# EAGLE board Comms_Main (EAGLE 7.7.0), part 1 of 2
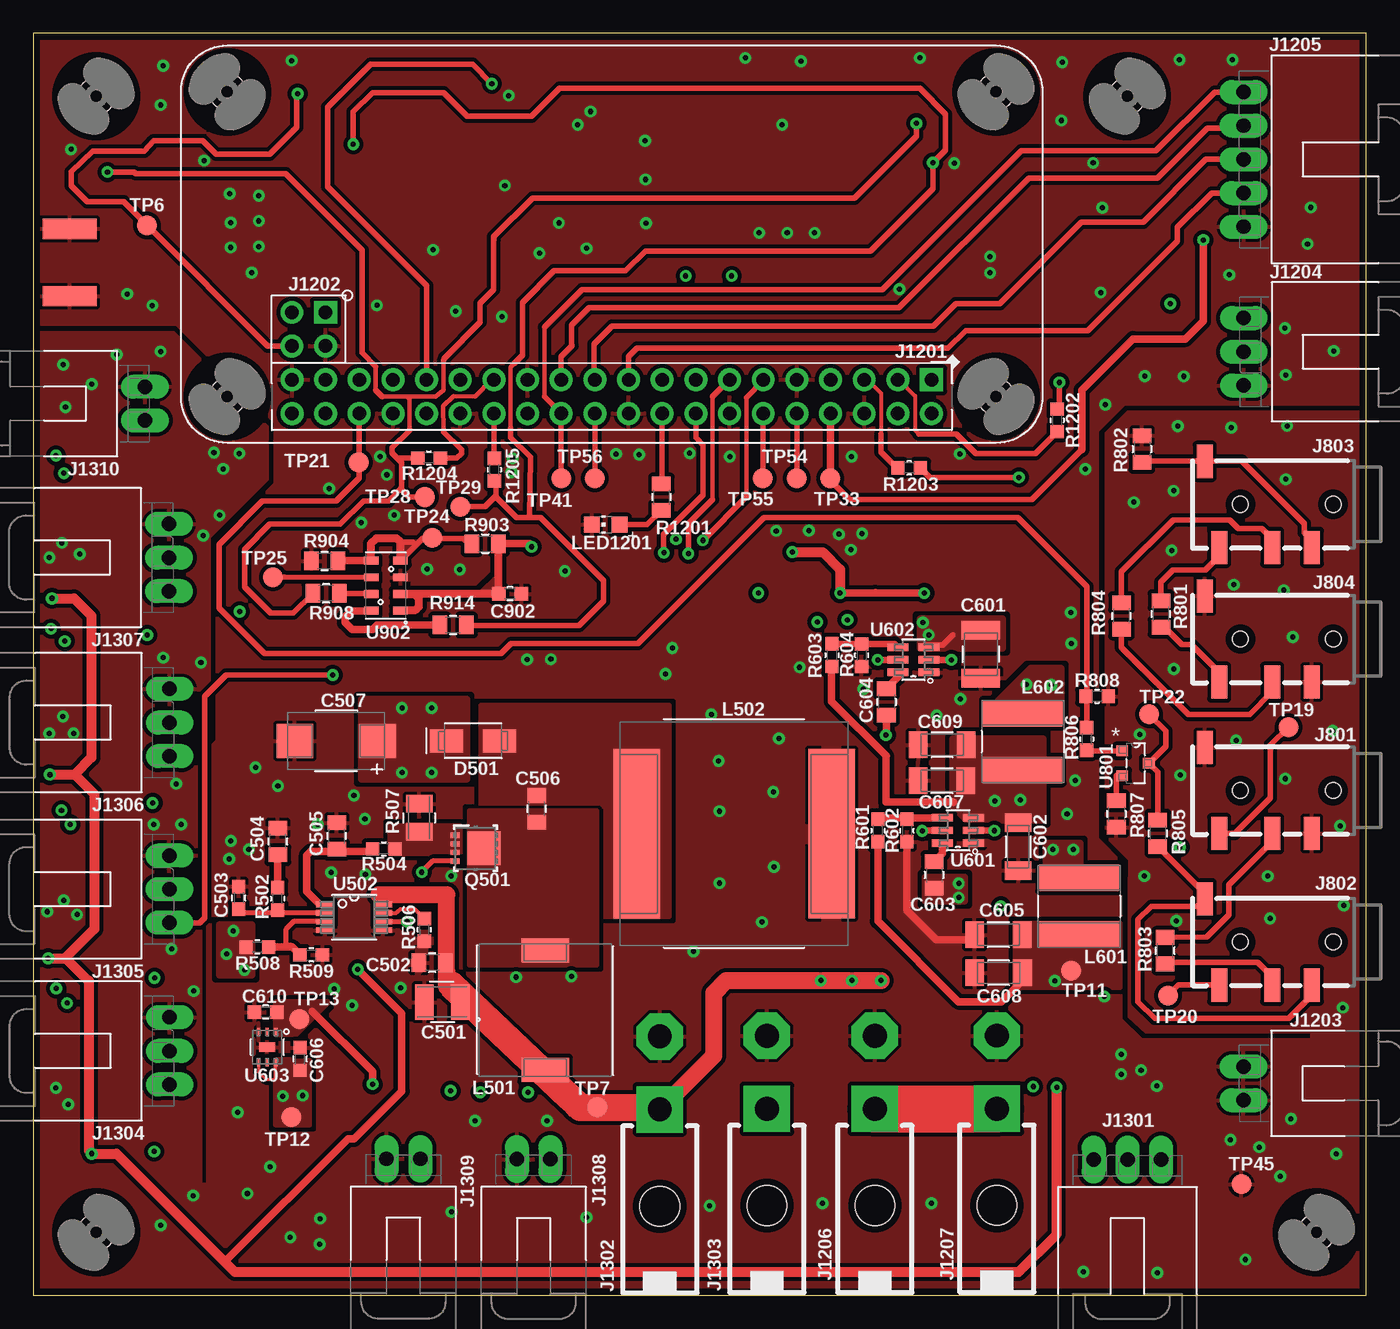
[diagram p0: board, top side]
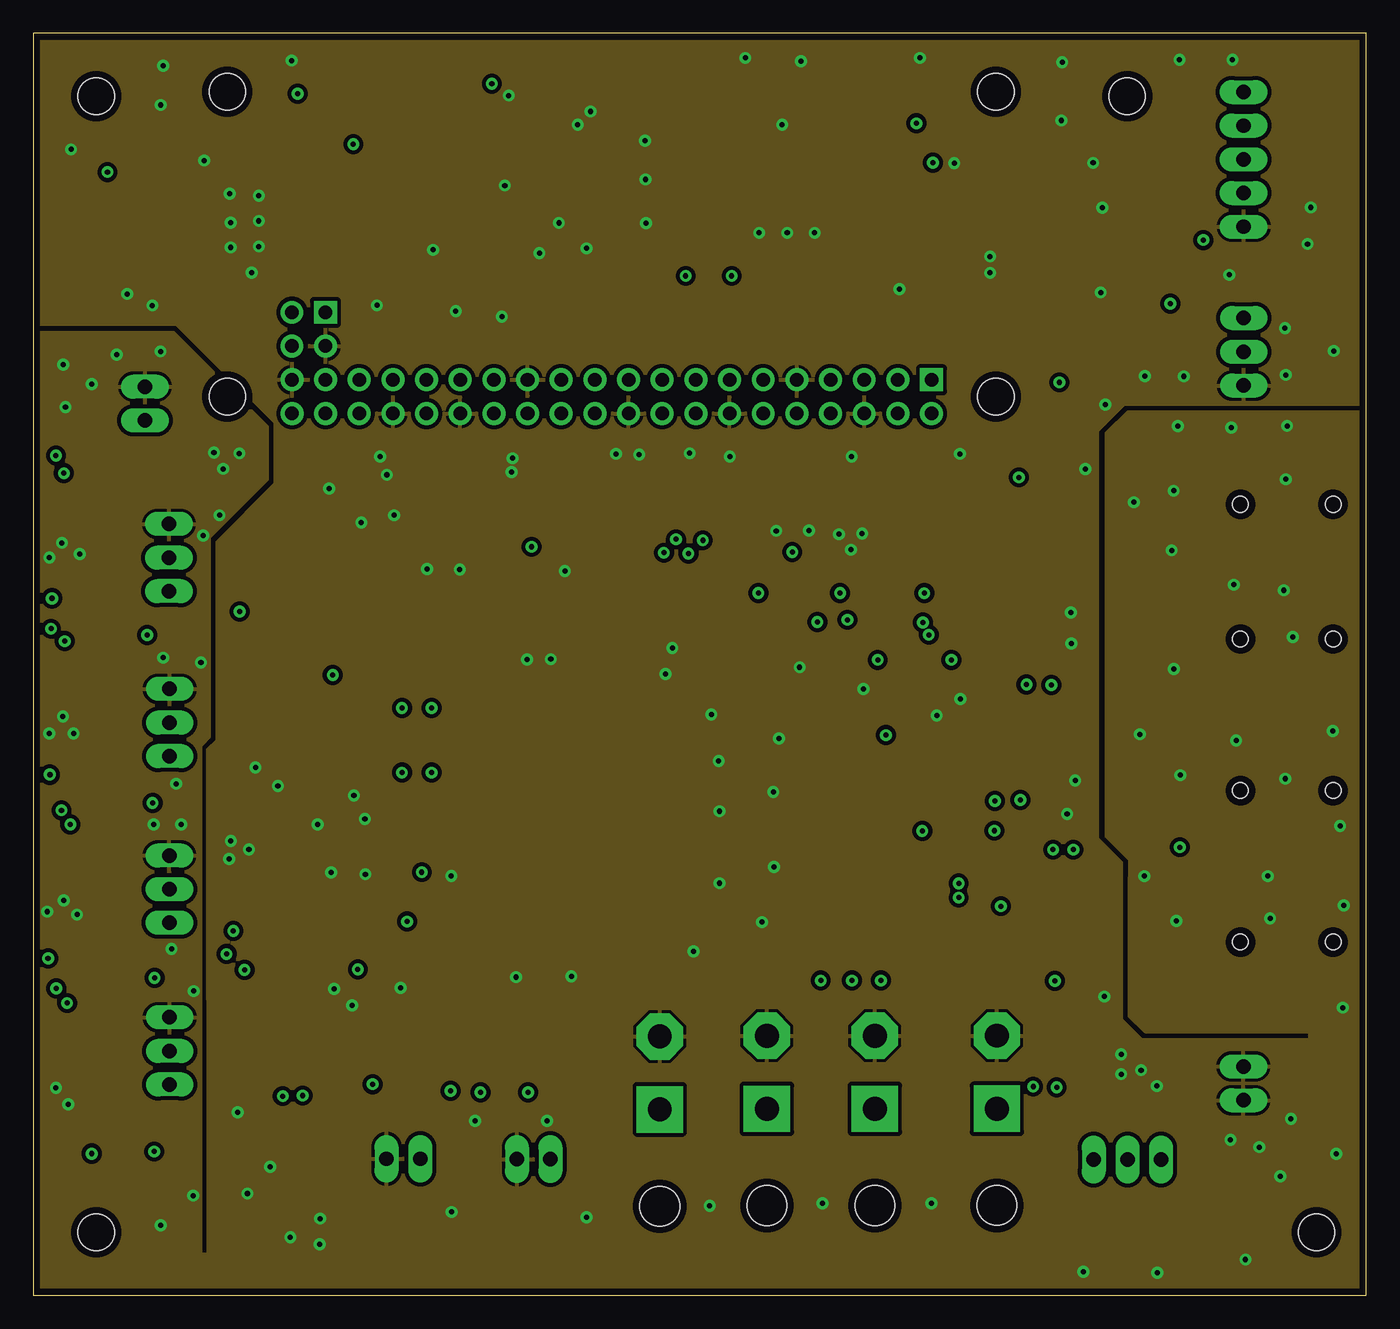
[diagram p1: board, inner layer GND]
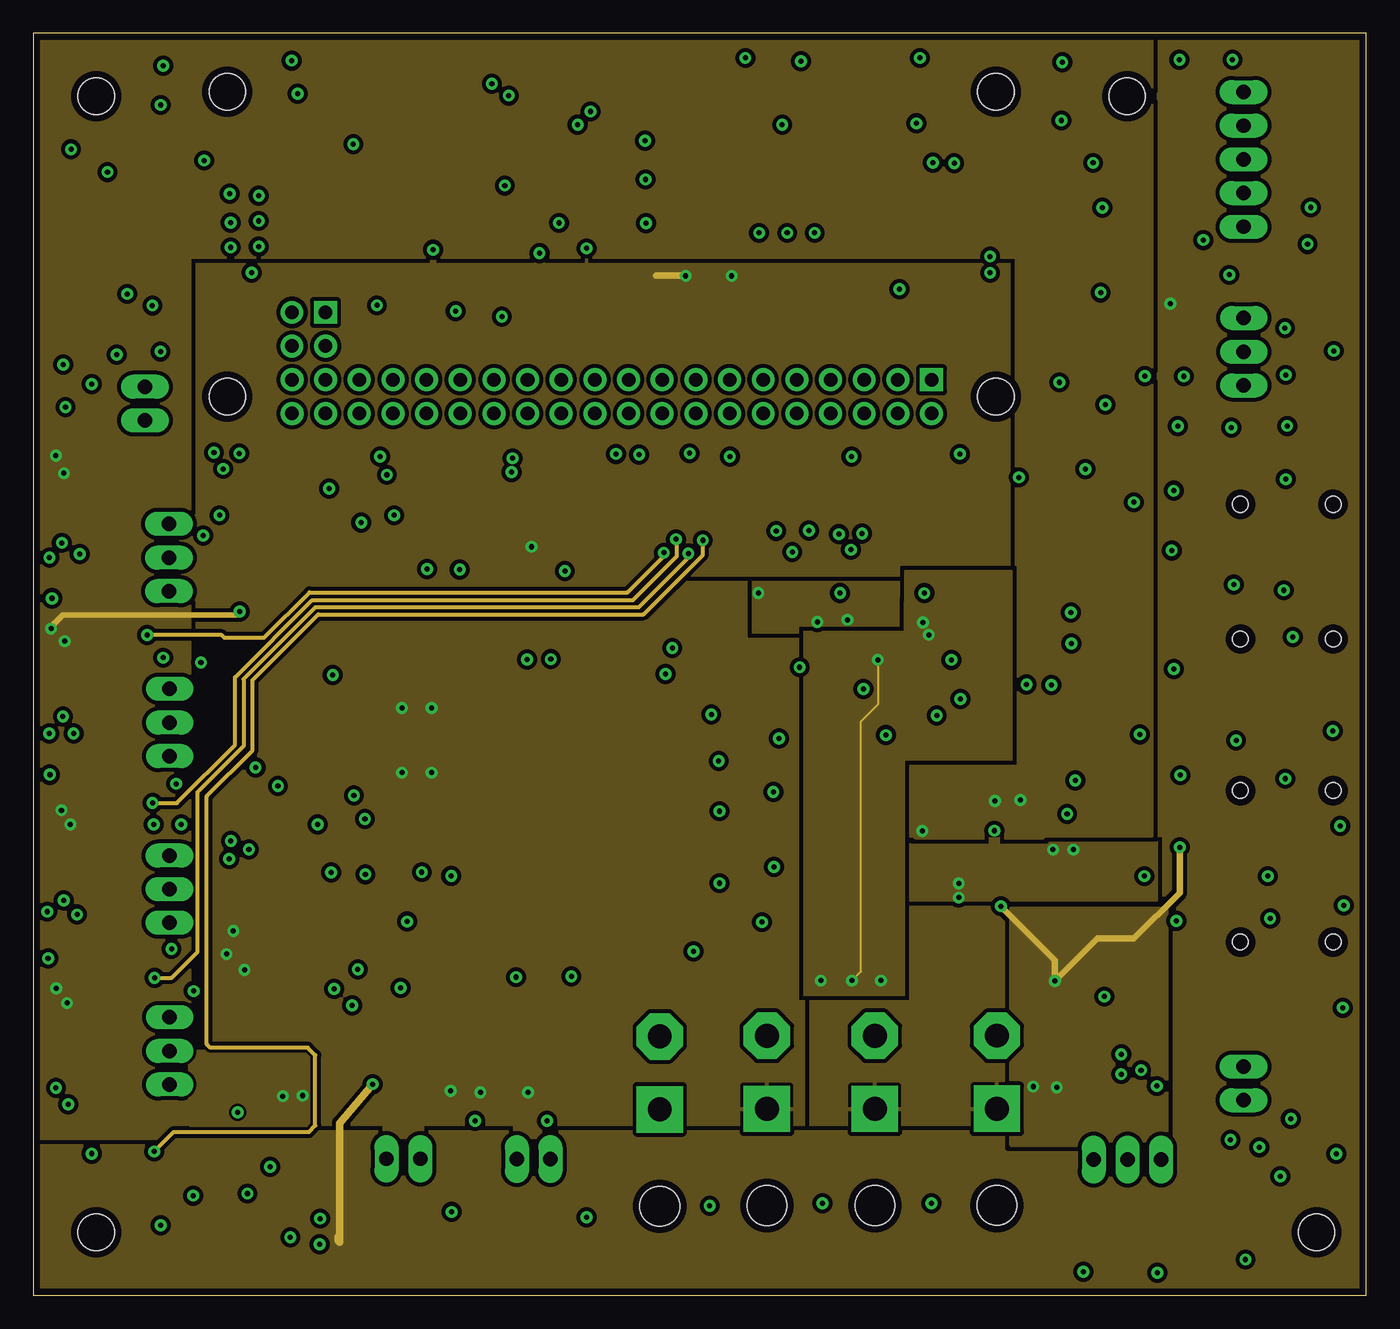
[diagram p2: board, inner layer POWER]
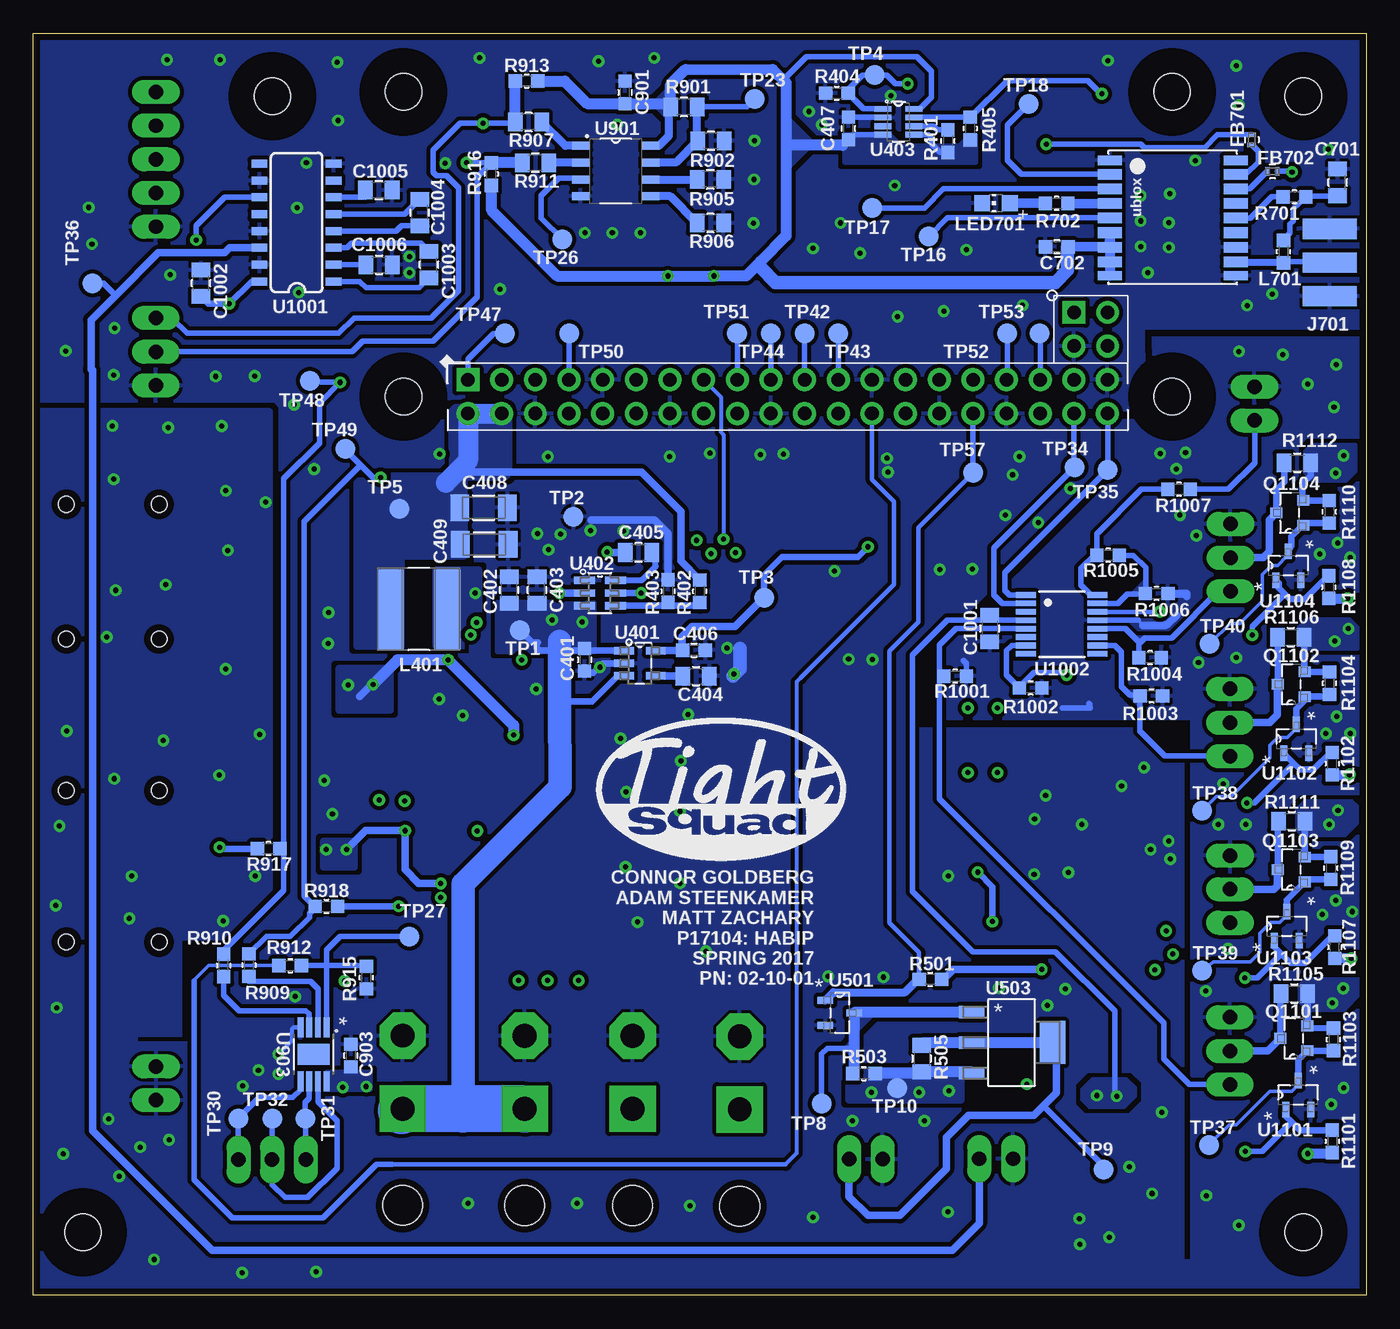
[diagram p3: board, bottom side, seen from below]

Size 100.6 x 95.25 mm. Coordinates in mm from the lower left corner, seen from the top.
Outline: 0,0 100.6,0 100.6,95.25 0,95.25 0,0
Copper layers (1+2*15+16): Top 0.035mm / dielectric 0.486mm / GND 0.035mm / dielectric 0.488mm / POWER 0.035mm / dielectric 0.486mm / Bottom 0.035mm
Design rules "4layer_4pcb": minimum track width 6mil, minimum drill 15mil, track to track 6mil, track to pad 6mil, pad to pad 6mil, via to via 6mil, smd to smd 6mil, copper to edge 20mil, drill to drill 10mil, minimum pad ring 14mil, minimum via ring 10mil, stop-mask expansion 2.5mil, vias tented up to drill 16mil, thermal gap 10mil
Net classes: 0 default: clearance 0.205 mm

## Footprints (pad centres in the part's own frame; a part is rotated, then mirrored left to right if it is on the bottom)
C0603 = smd 1 x 1: 1 -0.85,0; 2 0.85,0
C0805 = smd 1.1 x 1.4: 1 -1,0; 2 1,0
C1206 = smd 1.4 x 2: 1 -1.8,0; 2 1.8,0
C1411 = smd 1.4 x 2.7: 1 -1.35,0; 2 1.35,0
C2917 = smd 2.77 x 2.55: 1 -3.12,0; 2 3.12,0
C1210 = smd 1.4 x 2.9: 1 -1.8,0; 2 1.8,0
DO-214AC = smd 2.5 x 1.7: A -2,0; C 2,0
FB0402 = smd 0.325 x 0.65: 1 -0.375,0; 2 0.375,0
2,75_HOLE_RASPI = hole 2.75: 0,0
SMA-EDGE = smd 1.524 x 4.064: GND@0 0,0; GND@1 5.08,0; SIG 2.54,0 | smd 1.524 x 4.064 bottom: GND@2 0,0; GND@3 5.08,0
AUDIO-JACK-TRRS-SMD = smd 1.2 x 2.5: EARTH 11.3,-3.25; RING1 6.2,3.25; RING2 3.2,3.25; TIP 10.2,3.25 | hole 1.2: 1.6,0; 8.6,0
HEADER-2X20-254MM = drill 1.02 pad 1.52 square: 1 -24.13,-1.27 | drill 1.02 pad 1.52: 2 -24.13,1.27; 3 -21.59,-1.27; 4 -21.59,1.27; 5 -19.05,-1.27; 6 -19.05,1.27; 7 -16.51,-1.27; 8 -16.51,1.27; 9 -13.97,-1.27; 10 -13.97,1.27; 11 -11.43,-1.27; 12 -11.43,1.27; 13 -8.89,-1.27; 14 -8.89,1.27; 15 -6.35,-1.27; 16 -6.35,1.27; 17 -3.81,-1.27; 18 -3.81,1.27; 19 -1.27,-1.27; 20 -1.27,1.27; 21 1.27,-1.27; 22 1.27,1.27; 23 3.81,-1.27; 24 3.81,1.27; 25 6.35,-1.27; 26 6.35,1.27; 27 8.89,-1.27; 28 8.89,1.27; 29 11.43,-1.27; 30 11.43,1.27; 31 13.97,-1.27; 32 13.97,1.27; 33 16.51,-1.27; 34 16.51,1.27; 35 19.05,-1.27; 36 19.05,1.27; 37 21.59,-1.27; 38 21.59,1.27; 39 24.13,-1.27; 40 24.13,1.27
HEADER-2X2-254MM = drill 1.02 pad 1.52 square: 1 -1.27,-1.27 | drill 1.02 pad 1.52: 2 -1.27,1.27; 3 1.27,-1.27; 4 1.27,1.27
MOLSL-2-RA = drill 1.09 long: 1 -1.27,-7.62; 2 1.27,-7.62
MOLSL-3-RA = drill 1.09 long: 1 -2.54,-7.62; 2 0,-7.62; 3 2.54,-7.62
MOLSL-5-RA = drill 1.09 long: 1 -5.08,-7.62; 2 -2.54,-7.62; 3 0,-7.62; 4 2.54,-7.62; 5 5.08,-7.62
39-30-?02? = drill 1.8 pad 3.5 square: 1 0,0 | drill 1.8 pad 3.5 octagon: 2 0,5.512 | hole 3: 0,-7.3
SRN6045 = smd 2 x 6: 1 -2.15,0; 2 2.15,0
SRU1048 = smd 1.8 x 3.6: 1 -4.5,0; 2 4.5,0
HCMA1707 = smd 3.5 x 12.8: 1 -7.35,0; 2 7.35,0
L0603 = smd 1 x 1: 1 -0.85,0; 2 0.85,0
CHIP-LED0805 = smd 1.2 x 1.2: A 0,-1.05; C 0,1.05
RASPI_ZERO_4STANDOFFS = hole 2.75: 3.5,3.5; 61.5,3.5; 61.5,26.5; 3.5,26.5
DNH0008A = smd 0.7 x 0.4: 1 -1.55,0.975; 2 -1.55,0.325; 3 -1.55,-0.325; 4 -1.55,-0.975; 5 1.55,-0.975; 6 1.55,-0.325; 7 1.55,0.325; 8 1.55,0.975 | smd 2.51 x 2.55: 9 0.645,0 | smd 0.5 x 0.5: V 0.245,0.975
SOT103P240X110-3N = smd 0.9 x 0.8: 1 -1.016,0.94; 2 -1.016,-0.94; 3 1.016,0
R0603 = smd 1 x 1: 1 -0.85,0; 2 0.85,0
R0805 = smd 1.1 x 1.4: 1 -1,0; 2 1,0
R1206 = smd 1.32 x 2: 1 -1.05,0; 2 1.05,0
TP15R = smd 1.5 x 1.5: TP 0,0
DBV5 = smd 1.473 x 0.559: 1 -1.194,0.95; 2 -1.194,0; 3 -1.194,-0.95; 4 1.194,-0.95; 5 1.194,0.95
DDC0006A = smd 1.575 x 0.559: 1 -1.168,0.95; 2 -1.168,0; 3 -1.168,-0.95; 4 1.168,-0.95; 5 1.168,0; 6 1.168,0.95
SOT23P130X045-8N = smd 1.3 x 0.432: 1 -1.175,0.975; 2 -1.175,0.325; 3 -1.175,-0.325; 4 -1.175,-0.975; 5 1.175,-0.975; 6 1.175,-0.325; 7 1.175,0.325; 8 1.175,0.975
SOT95P230X110-3N = smd 1.168 x 0.533: 1 -1.092,0.94; 2 -1.092,-0.94; 3 1.092,0
MUA08A = smd 1.372 x 0.432: 1 -2.197,0.975; 2 -2.197,0.325; 3 -2.197,-0.325; 4 -2.197,-0.975; 5 2.197,-0.975; 6 2.197,-0.325; 7 2.197,0.325; 8 2.197,0.975
SOT230P700X180-4N = smd 1.9 x 0.95: 1 -3,2.3; 2 -3,0; 3 -3,-2.3 | smd 1.9 x 3.25: 4 3.1,0
6WDFN = smd 0.25 x 0.6: 1 -0.65,-1.15; 2 0,-1.15; 3 0.65,-1.15; 4 0.65,1.15; 5 0,1.15; 6 -0.65,1.15 | smd 1.2 x 0.75: 7 0,0
UBLOX_MAX = smd 1.8 x 0.7: 1_GND 4.95,-4.4; 9_V_RESET 4.95,4.3; 10_GND -4.55,4.3; 18_RESERVED -4.55,-4.4 | smd 1.8 x 0.8: 2_TXD1 4.95,-3.35; 3_RXD1 4.95,-2.25; 4_TIMEPULSE 4.95,-1.15; 5_EXTINT0 4.95,-0.05; 6_V_BCKP 4.95,1.05; 7_VCC_IO 4.95,2.15; 8_VCC 4.95,3.25; 11_RF_IN -4.55,3.25; 12_GND -4.55,2.15; 13_ANTON -4.55,1.05; 14_VCC_RF -4.55,-0.05; 15_RESERVED -4.55,-1.15; 16_SDA2 -4.55,-2.25; 17_SCL2 -4.55,-3.35
SOIC127P130X0600-8N = smd 1.3 x 0.6: 1 -2.65,1.905; 2 -2.65,0.635; 3 -2.65,-0.635; 4 -2.65,-1.905; 5 2.65,-1.905; 6 2.65,-0.635; 7 2.65,0.635; 8 2.65,1.905
SMD125P110X060-8N = smd 1.1 x 0.6: 1 -1.1,1.875; 2 -1.1,0.625; 3 -1.1,-0.625; 4 -1.1,-1.875; 5 1.1,-1.875; 6 1.1,-0.625; 7 1.1,0.625; 8 1.1,1.875
SOP65P490X110-8N = smd 1.524 x 0.432: 1 -2.032,0.98; 2 -2.032,0.33; 3 -2.032,-0.33; 4 -2.032,-0.98; 5 2.032,-0.98; 6 2.032,-0.33; 7 2.032,0.33; 8 2.032,0.98 | smd 1.549 x 2.4: 9 0,0
SO016 = smd 0.6 x 1.2: 1 -4.445,-2.8; 2 -3.175,-2.8; 3 -1.905,-2.8; 4 -0.635,-2.8; 5 0.635,-2.8; 6 1.905,-2.8; 7 3.175,-2.8; 8 4.445,-2.8; 9 4.445,2.8; 10 3.175,2.8; 11 1.905,2.8; 12 0.635,2.8; 13 -0.635,2.8; 14 -1.905,2.8; 15 -3.175,2.8; 16 -4.445,2.8
QSOP16 = smd 0.427 x 1.5: 1 -2.223,-2.69; 2 -1.587,-2.69; 3 -0.953,-2.69; 4 -0.318,-2.69; 5 0.318,-2.69; 6 0.953,-2.69; 7 1.587,-2.69; 8 2.223,-2.69; 9 2.223,2.69; 10 1.587,2.69; 11 0.953,2.69; 12 0.318,2.69; 13 -0.318,2.69; 14 -0.953,2.69; 15 -1.587,2.69; 16 -2.223,2.69

## Placement (x,y rotation side)
C401  1uF  [C0603]  58.99,47.96 270 bottom
C402  10uF  [C0805]  64.68,53.22 90 bottom
C403  10uF  [C0805]  62.58,53.22 90 bottom
C404  10nF  [C0805]  50.57,46.73 0 bottom
C405  100nF  [C0805]  54.92,56.06 180 bottom
C406  4.7uF  [C0603]  50.73,48.69 0 bottom
C407  100nF  [C0603]  39.09,88.06 90 bottom
C408  22uF  [C1206]  66.6,59.44 0 bottom
C409  22uF  [C1206]  66.56,56.67 0 bottom
C501  8.2 uF  [C1411]  30.88,22.13 180 top
C502  100nF  [C0805]  30.11,25.11 180 top
C503  2.4nF  [C0603]  15.51,30 90 top
C504  100nF  [C0805]  18.47,34.26 90 top
C505  620pF  [C0805]  22.92,34.66 90 top
C506  4.7uF  [C0805]  37.99,36.73 90 top
C507  47uF  [C2917]  22.87,41.83 180 top
C601  22uF  [C1210]  71.5,48.38 270 top
C602  22uF  [C1206]  74.33,33.87 270 top
C603  100nF  [C0805]  67.98,31.73 270 top
C604  100nF  [C0805]  64.39,44.78 270 top
C605  22uF  [C1206]  72.84,27.22 180 top
C606  1uF  [C0603]  20.14,17.84 90 top
C607  22uF  [C1206]  68.58,38.84 180 top
C608  22uF  [C1206]  72.84,24.35 180 top
C609  22uF  [C1206]  68.6,41.56 180 top
C610  1uF  [C0603]  17.55,21.38 180 top
C701  10nF  [C0805]  2.17,83.99 90 bottom
C702  100nF  [C0603]  23.36,79.12 180 bottom
C901  100nF  [C0603]  55.95,90.78 270 bottom
C902  100nF  [C0603]  35.99,52.94 180 top
C903  100nF  [C0603]  76.62,18.09 90 bottom
C1001  100nF  [C0805]  28.42,50.33 270 bottom
C1002  100nF  [C0805]  87.93,76.37 90 bottom
C1003  100nF  [C0805]  70.73,77.78 90 bottom
C1004  100nF  [C0805]  71.44,81.71 90 bottom
C1005  100nF  [C0805]  74.52,83.41 0 bottom
C1006  100nF  [C0805]  74.49,77.78 0 bottom
D501  CDBA340-HF  [DO-214AC]  33.2,41.84 180 top
FB701  BLM15HD102SN1D  [FB0402]  8.65,87.2 270 bottom
FB702  BLM15HD102SN1D  [FB0402]  7.09,84.82 180 bottom
H1201  MOUNT-HOLE_2.75  [2,75_HOLE_RASPI]  4.76,90.49 0 top
H1202  MOUNT-HOLE_2.75  [2,75_HOLE_RASPI]  82.55,90.49 0 top
H1203  MOUNT-HOLE_2.75  [2,75_HOLE_RASPI]  4.76,4.76 0 top
H1204  MOUNT-HOLE_2.75  [2,75_HOLE_RASPI]  96.84,4.76 0 top
IMAGE101  SQUAD_LOGO  [SQUAD_LOGO]  58.21,32.69 0 bottom
J701  WRL-00593  [SMA-EDGE]  2.77,75.4 90 bottom
J801  PRT-12639  [AUDIO-JACK-TRRS-SMD]  99.69,38.1 180 top
J802  PRT-12639  [AUDIO-JACK-TRRS-SMD]  99.69,26.67 180 top
J803  PRT-12639  [AUDIO-JACK-TRRS-SMD]  99.69,59.69 180 top
J804  PRT-12639  [AUDIO-JACK-TRRS-SMD]  99.69,49.53 180 top
J1201  RECEPTACLE-2x20-254MM  [HEADER-2X20-254MM]  43.66,67.83 180 top
J1202  RECEPTACLE-2x2-254MM  [HEADER-2X2-254MM]  20.8,72.91 180 top
J1203  MOL-SL-2-RA  [MOLSL-2-RA]  98.94,16.01 270 top
J1204  MOL-SL-3-RA  [MOLSL-3-RA]  98.97,71.21 270 top
J1205  MOL-SL-5-RA  [MOLSL-5-RA]  98.96,85.72 270 top
J1206  MOL-MINIJR-2P-RA  [39-30-?02?]  63.51,14.08 0 top
J1207  MOL-MINIJR-2P-RA  [39-30-?02?]  72.72,14.09 0 top
J1301  MOL-SL-3-RA  [MOLSL-3-RA]  82.57,2.64 180 top
J1302  MOL-MINIJR-2P-RA  [39-30-?02?]  47.28,14.03 0 top
J1303  MOL-MINIJR-2P-RA  [39-30-?02?]  55.37,14.08 0 top
J1304  MOL-SL-3-RA  [MOLSL-3-RA]  2.68,18.45 90 top
J1305  MOL-SL-3-RA  [MOLSL-3-RA]  2.66,30.66 90 top
J1306  MOL-SL-3-RA  [MOLSL-3-RA]  2.68,43.23 90 top
J1307  MOL-SL-3-RA  [MOLSL-3-RA]  2.63,55.68 90 top
J1308  MOL-SL-2-RA  [MOLSL-2-RA]  37.77,2.66 180 top
J1309  MOL-SL-2-RA  [MOLSL-2-RA]  27.94,2.69 180 top
J1310  MOL-SL-2-RA  [MOLSL-2-RA]  0.82,67.3 90 top
L401  4.7uH  [SRN6045]  71.5,51.79 180 bottom
L501  10uH  [SRU1048]  38.64,21.53 90 top
L502  68uH  [HCMA1707]  52.9,34.83 0 top
L601  3.3uH  [SRN6045]  78.92,29.36 270 top
L602  4.7uH  [SRN6045]  74.68,41.79 270 top
L701  27nH  [L0603]  6.24,78.76 90 bottom
LED701  LTST-C170CKT  [CHIP-LED0805]  27.94,82.42 90 bottom
LED1201  LTST-C170CKT  [CHIP-LED0805]  43.2,58.16 90 top
OFFBOARD1  50-57-9403  [MOLSL-OFFBOARD]  -8.56,-5.25 0 top  (outside the outline)
OFFBOARD2  0016020087  [MOLSL-OFFBOARD]  -8.56,-7.46 0 top  (outside the outline)
OFFBOARD3  0050579405  [MOLSL-OFFBOARD]  -8.56,-9.67 0 top  (outside the outline)
OFFBOARD4  0016020087  [MOLSL-OFFBOARD]  -8.56,-11.88 0 top  (outside the outline)
OFFBOARD5  67996-104HLF  [MOLSL-OFFBOARD]  -8.56,-14.09 0 top  (outside the outline)
OFFBOARD6  PRPC020DAAN-RC  [MOLSL-OFFBOARD]  -8.56,-16.3 0 top  (outside the outline)
OFFBOARD7  50-57-9403  [MOLSL-OFFBOARD]  -8.56,-18.51 0 top  (outside the outline)
OFFBOARD8  0016020087  [MOLSL-OFFBOARD]  -8.56,-20.72 0 top  (outside the outline)
OFFBOARD9  50-57-9402  [MOLSL-OFFBOARD]  -8.56,-22.93 0 top  (outside the outline)
OFFBOARD10  0016020087  [MOLSL-OFFBOARD]  -8.56,-25.14 0 top  (outside the outline)
OFFBOARD11  50-57-9403  [MOLSL-OFFBOARD]  -8.56,-27.35 0 top  (outside the outline)
OFFBOARD12  0016020087  [MOLSL-OFFBOARD]  -8.56,-29.56 0 top  (outside the outline)
OFFBOARD13  50-57-9402  [MOLSL-OFFBOARD]  -8.56,-31.77 0 top  (outside the outline)
OFFBOARD14  0016020087  [MOLSL-OFFBOARD]  -8.56,-33.98 0 top  (outside the outline)
OFFBOARD15  50-57-9402  [MOLSL-OFFBOARD]  -8.56,-36.19 0 top  (outside the outline)
OFFBOARD16  0016020087  [MOLSL-OFFBOARD]  -8.56,-38.4 0 top  (outside the outline)
OFFBOARD17  0016020087  [MOLSL-OFFBOARD]  -8.56,-40.61 0 top  (outside the outline)
OFFBOARD18  0016020087  [MOLSL-OFFBOARD]  -8.56,-42.82 0 top  (outside the outline)
OFFBOARD19  0016020087  [MOLSL-OFFBOARD]  -8.56,-45.03 0 top  (outside the outline)
OFFBOARD20  0016020087  [MOLSL-OFFBOARD]  -8.56,-47.24 0 top  (outside the outline)
OFFBOARD21  0016020087  [MOLSL-OFFBOARD]  -8.56,-49.45 0 top  (outside the outline)
OFFBOARD22  0016020087  [MOLSL-OFFBOARD]  -8.56,-51.66 0 top  (outside the outline)
OFFBOARD23  0016020087  [MOLSL-OFFBOARD]  -8.56,-53.87 0 top  (outside the outline)
OFFBOARD24  0016020087  [MOLSL-OFFBOARD]  -8.56,-56.08 0 top  (outside the outline)
OFFBOARD25  0016020087  [MOLSL-OFFBOARD]  -8.56,-58.29 0 top  (outside the outline)
OFFBOARD26  0016020087  [MOLSL-OFFBOARD]  -8.56,-60.5 0 top  (outside the outline)
OFFBOARD27  0016020087  [MOLSL-OFFBOARD]  -8.56,-62.71 0 top  (outside the outline)
OFFBOARD28  0016020087  [MOLSL-OFFBOARD]  -8.56,-64.92 0 top  (outside the outline)
OFFBOARD29  0016020087  [MOLSL-OFFBOARD]  -8.56,-67.13 0 top  (outside the outline)
OFFBOARD30  50-57-9403  [MOLSL-OFFBOARD]  -8.56,-69.34 0 top  (outside the outline)
OFFBOARD31  0016020087  [MOLSL-OFFBOARD]  -8.56,-71.55 0 top  (outside the outline)
OFFBOARD32  0016020087  [MOLSL-OFFBOARD]  -8.56,-73.76 0 top  (outside the outline)
OFFBOARD33  0016020087  [MOLSL-OFFBOARD]  -8.56,-75.97 0 top  (outside the outline)
OFFBOARD34  50-57-9403  [MOLSL-OFFBOARD]  -8.56,-78.18 0 top  (outside the outline)
OFFBOARD35  0016020087  [MOLSL-OFFBOARD]  -8.56,-80.39 0 top  (outside the outline)
OFFBOARD36  0016020087  [MOLSL-OFFBOARD]  -8.56,-82.6 0 top  (outside the outline)
OFFBOARD37  0016020087  [MOLSL-OFFBOARD]  -8.56,-84.81 0 top  (outside the outline)
OFFBOARD38  50-57-9403  [MOLSL-OFFBOARD]  -8.56,-87.02 0 top  (outside the outline)
OFFBOARD39  0016020087  [MOLSL-OFFBOARD]  -8.56,-89.23 0 top  (outside the outline)
OFFBOARD40  0016020087  [MOLSL-OFFBOARD]  -8.56,-91.44 0 top  (outside the outline)
OFFBOARD41  0016020087  [MOLSL-OFFBOARD]  -8.56,-93.65 0 top  (outside the outline)
OFFBOARD42  50-57-9402  [MOLSL-OFFBOARD]  -8.56,-95.86 0 top  (outside the outline)
OFFBOARD43  0016020087  [MOLSL-OFFBOARD]  -8.56,-98.07 0 top  (outside the outline)
OFFBOARD44  0016020087  [MOLSL-OFFBOARD]  -8.56,-100.28 0 top  (outside the outline)
OFFBOARD45  0701070001  [MOLSL-OFFBOARD]  -8.56,-102.49 0 top  (outside the outline)
OFFBOARD46  0016020115  [MOLSL-OFFBOARD]  -8.56,-104.7 0 top  (outside the outline)
OFFBOARD47  0016020115  [MOLSL-OFFBOARD]  -8.56,-106.91 0 top  (outside the outline)
OFFBOARD48  50-57-9402  [MOLSL-OFFBOARD]  -8.56,-109.12 0 top  (outside the outline)
OFFBOARD49  0039013022  [MOLSL-OFFBOARD]  -8.56,-111.33 0 top  (outside the outline)
OFFBOARD50  0039000073  [MOLSL-OFFBOARD]  -8.56,-113.54 0 top  (outside the outline)
OFFBOARD51  0039000073  [MOLSL-OFFBOARD]  -8.56,-115.75 0 top  (outside the outline)
OFFBOARD52  0039013022  [MOLSL-OFFBOARD]  -8.56,-117.96 0 top  (outside the outline)
OFFBOARD53  0039000073  [MOLSL-OFFBOARD]  -8.56,-120.17 0 top  (outside the outline)
OFFBOARD54  0039000073  [MOLSL-OFFBOARD]  -8.56,-122.38 0 top  (outside the outline)
OFFBOARD55  0039013022  [MOLSL-OFFBOARD]  -8.56,-124.59 0 top  (outside the outline)
OFFBOARD56  0039013022  [MOLSL-OFFBOARD]  -8.56,-126.8 0 top  (outside the outline)
OFFBOARD57  0039000073  [MOLSL-OFFBOARD]  -8.56,-129.01 0 top  (outside the outline)
OFFBOARD58  0039000073  [MOLSL-OFFBOARD]  -8.56,-131.22 0 top  (outside the outline)
OFFBOARD59  0039000073  [MOLSL-OFFBOARD]  -8.56,-133.43 0 top  (outside the outline)
OFFBOARD60  0039000073  [MOLSL-OFFBOARD]  -8.56,-135.64 0 top  (outside the outline)
OFFBOARD61  0039013023  [MOLSL-OFFBOARD]  -8.56,-137.85 0 top  (outside the outline)
OFFBOARD62  0039000075  [MOLSL-OFFBOARD]  -8.56,-140.06 0 top  (outside the outline)
OFFBOARD63  0039000075  [MOLSL-OFFBOARD]  -8.56,-142.27 0 top  (outside the outline)
OFFBOARD64  0039013022  [MOLSL-OFFBOARD]  -8.56,-144.48 0 top  (outside the outline)
OFFBOARD65  0039013022  [MOLSL-OFFBOARD]  -8.56,-146.69 0 top  (outside the outline)
OFFBOARD66  0039000073  [MOLSL-OFFBOARD]  -8.56,-148.9 0 top  (outside the outline)
OFFBOARD67  0039000073  [MOLSL-OFFBOARD]  -8.56,-151.11 0 top  (outside the outline)
OFFBOARD68  0039000073  [MOLSL-OFFBOARD]  -8.56,-153.32 0 top  (outside the outline)
OFFBOARD69  0039000073  [MOLSL-OFFBOARD]  -8.56,-155.53 0 top  (outside the outline)
OFFBOARD70  0039013023  [MOLSL-OFFBOARD]  -8.56,-157.74 0 top  (outside the outline)
OFFBOARD71  0039000075  [MOLSL-OFFBOARD]  -8.56,-159.95 0 top  (outside the outline)
OFFBOARD72  0039000075  [MOLSL-OFFBOARD]  -8.56,-162.16 0 top  (outside the outline)
OUTLINE1201  RASPI-ZERO-4STANDOFFS-0CAM  [RASPI_ZERO_4STANDOFFS]  76.15,94.32 180 top
Q501  CSD17579Q3A  [DNH0008A]  33.38,33.75 0 top
Q1101  NTR4101PT1G  [SOT103P240X110-3N]  5.48,19.4 180 bottom
Q1102  NTR4101PT1G  [SOT103P240X110-3N]  5.66,46.12 180 bottom
Q1103  NTR4101PT1G  [SOT103P240X110-3N]  5.67,32.14 180 bottom
Q1104  NTR4101PT1G  [SOT103P240X110-3N]  5.79,59.05 180 bottom
R401  0  [R0603]  31.57,87.1 90 bottom
R402  56.2k  [R0603]  50.3,53.13 90 bottom
R403  10k  [R0603]  52.69,53.15 270 bottom
R404  10k  [R0603]  39.95,90.72 0 bottom
R405  10k  [R0603]  29.89,88.05 270 bottom
R501  10k  [R0603]  32.9,23.86 0 bottom
R502  1.15k  [R0603]  18.44,29.93 270 top
R503  10k  [R0603]  37.91,16.74 0 bottom
R504  100  [R0603]  26.46,33.7 0 top
R505  0.0  [R0805]  33.56,17.87 270 bottom
R506  30.1k  [R0603]  29.52,27.59 90 top
R507  0.016  [R1206]  29.13,36.05 270 top
R508  84.5k  [R0603]  16.93,26.29 180 top
R509  10k  [R0603]  20.98,25.69 180 top
R601  33.2k  [R0603]  63.74,35.09 270 top
R602  10k  [R0603]  65.93,35.08 90 top
R603  56.2k  [R0603]  60.27,48.32 270 top
R604  10k  [R0603]  62.52,48.31 90 top
R701  10  [R0603]  5.43,82.89 180 bottom
R702  390  [R0603]  23.37,82.41 180 bottom
R801  0.0  [R0805]  85.1,51.43 90 top
R802  0.0  [R0805]  83.66,63.87 270 top
R803  0.0  [R0805]  85.41,26.02 90 top
R804  0.0  [R0805]  82.12,51.28 90 top
R805  0.0  [R0805]  84.86,34.87 270 top
R806  1k  [R0603]  79.5,41.99 270 top
R807  0.0  [R0805]  81.73,36.32 270 top
R808  1k  [R0603]  80.28,45.21 0 top
R901  0.0  [R0805]  51.49,89.68 180 bottom
R902  0.0  [R0805]  49.45,87.13 180 bottom
R903  0.0  [R0805]  34.12,56.72 0 top
R904  0.0  [R0805]  22,55.42 0 top
R905  0.0  [R0805]  49.5,84.21 180 bottom
R906  0.0  [R0805]  49.5,80.92 180 bottom
R907  0.0  [R0805]  63.23,88.54 180 bottom
R908  0.0  [R0805]  22.11,52.98 180 top
R909  0  [R0603]  84.32,24.92 270 bottom
R910  0  [R0603]  86.23,24.9 270 bottom
R911  0.0  [R0805]  62.7,85.46 180 bottom
R912  0  [R0603]  81.2,24.89 0 bottom
R913  4.7k  [R0603]  63.36,91.63 0 bottom
R914  0.0  [R0805]  31.69,50.59 0 top
R915  0  [R0603]  75.45,23.98 90 bottom
R916  4.7k  [R0603]  66.02,84.61 270 bottom
R917  4.7k  [R0603]  82.83,33.71 180 bottom
R918  4.7k  [R0603]  78.47,29.35 0 bottom
R1001  75  [R0603]  31.02,46.72 180 bottom
R1002  75  [R0603]  25.34,45.84 180 bottom
R1003  75  [R0603]  16.22,45.23 180 bottom
R1004  75  [R0603]  16.32,48.12 180 bottom
R1005  0  [R0603]  19.48,55.84 180 bottom
R1006  0  [R0603]  15.82,52.96 180 bottom
R1007  75  [R0603]  14.14,60.84 180 bottom
R1101  10k  [R0603]  2.57,11.63 270 bottom
R1102  10k  [R0603]  2.58,40.13 270 bottom
R1103  10k  [R0603]  2.47,19.32 90 bottom
R1104  10k  [R0603]  2.78,46.19 90 bottom
R1105  0.0  [R0805]  5.43,22.79 0 bottom
R1106  0.0  [R0805]  5.69,49.67 0 bottom
R1107  10k  [R0603]  2.39,26.28 270 bottom
R1108  10k  [R0603]  2.83,53.45 270 bottom
R1109  10k  [R0603]  2.68,32.25 90 bottom
R1110  10k  [R0603]  2.79,59.13 90 bottom
R1111  0.0  [R0805]  5.63,35.79 0 bottom
R1112  0.0  [R0805]  5.21,62.83 0 bottom
R1201  150  [R0805]  47.41,60.24 270 top
R1202  23.2  [R0603]  77.27,66.04 270 top
R1203  23.2  [R0603]  66.11,62.44 180 top
R1204  23.2  [R0603]  29.87,63.19 0 top
R1205  23.2  [R0603]  34.8,62.31 270 top
TP1  TPTP15R  [TP15R]  63.87,50.21 180 bottom
TP2  TPTP15R  [TP15R]  59.83,58.76 0 bottom
TP3  TPTP15R  [TP15R]  45.44,52.66 0 bottom
TP4  TPTP15R  [TP15R]  37.09,92.09 0 bottom
TP5  TPTP15R  [TP15R]  72.95,59.37 0 bottom
TP6  TPTP15R  [TP15R]  8.59,80.75 0 top
TP7  TPTP15R  [TP15R]  42.58,14.2 0 top
TP8  TPTP15R  [TP15R]  41.1,14.47 180 bottom
TP9  TPTP15R  [TP15R]  19.82,9.5 0 bottom
TP10  TPTP15R  [TP15R]  35.39,15.65 0 bottom
TP11  TPTP15R  [TP15R]  78.31,24.5 90 top
TP12  TPTP15R  [TP15R]  19.49,13.45 0 top
TP13  TPTP15R  [TP15R]  20.09,20.86 0 top
TP16  TPTP15R  [TP15R]  33.01,79.91 0 bottom
TP17  TPTP15R  [TP15R]  37.28,82.06 0 bottom
TP18  TPTP15R  [TP15R]  25.49,89.9 0 bottom
TP19  TPTP15R  [TP15R]  94.73,42.89 0 top
TP20  TPTP15R  [TP15R]  85.64,22.63 180 top
TP21  TPTP15R  [TP15R]  24.56,62.85 0 top
TP22  TPTP15R  [TP15R]  84.2,43.84 0 top
TP23  TPTP15R  [TP15R]  46.15,90.28 0 bottom
TP24  TPTP15R  [TP15R]  30.11,57.16 0 top
TP25  TPTP15R  [TP15R]  18.08,54.18 180 top
TP26  TPTP15R  [TP15R]  60.66,79.69 0 bottom
TP27  TPTP15R  [TP15R]  72.21,27.08 0 bottom
TP28  TPTP15R  [TP15R]  29.55,60.24 0 top
TP29  TPTP15R  [TP15R]  32.23,59.52 0 top
TP30  TPTP15R  [TP15R]  85.12,13.36 0 bottom
TP31  TPTP15R  [TP15R]  80.04,13.36 0 bottom
TP32  TPTP15R  [TP15R]  82.56,13.36 0 bottom
TP33  TPTP15R  [TP15R]  60.14,61.67 0 top
TP34  TPTP15R  [TP15R]  22.03,62.47 0 bottom
TP35  TPTP15R  [TP15R]  19.52,62.3 0 bottom
TP36  TPTP15R  [TP15R]  96.14,76.36 0 bottom
TP37  TPTP15R  [TP15R]  11.88,11.35 0 bottom
TP38  TPTP15R  [TP15R]  12.41,36.57 0 bottom
TP39  TPTP15R  [TP15R]  12.39,24.5 0 bottom
TP40  TPTP15R  [TP15R]  11.83,49.18 0 bottom
TP41  TPTP15R  [TP15R]  39.87,61.67 0 top
TP42  TPTP15R  [TP15R]  42.37,72.59 0 bottom
TP43  TPTP15R  [TP15R]  39.84,72.59 0 bottom
TP44  TPTP15R  [TP15R]  44.95,72.59 0 bottom
TP45  TPTP15R  [TP15R]  91.17,8.4 0 top
TP47  TPTP15R  [TP15R]  65,72.59 0 bottom
TP48  TPTP15R  [TP15R]  79.72,69.02 0 bottom
TP49  TPTP15R  [TP15R]  77.05,63.89 0 bottom
TP50  TPTP15R  [TP15R]  60.14,72.59 0 bottom
TP51  TPTP15R  [TP15R]  47.49,72.59 0 bottom
TP52  TPTP15R  [TP15R]  27.09,72.59 0 bottom
TP53  TPTP15R  [TP15R]  24.64,72.59 0 bottom
TP54  TPTP15R  [TP15R]  57.6,61.67 0 top
TP55  TPTP15R  [TP15R]  55.05,61.67 0 top
TP56  TPTP15R  [TP15R]  42.37,61.67 0 top
TP57  TPTP15R  [TP15R]  29.68,62.09 0 bottom
U401  LP2985-33DBVR  [DBV5]  54.82,47.7 0 bottom
U402  TPS562209DDCT  [DDC0006A]  57.83,53 0 bottom
U403  MAX6371  [SOT23P130X045-8N]  35.31,88.56 0 bottom
U501  2N7002P,215  [SOT95P230X110-3N]  39.73,21.32 0 bottom
U502  LM3488MMX/NOPB  [MUA08A]  24.22,28.53 0 top
U503  NDT2955  [SOT230P700X180-4N]  26.78,19.08 0 bottom
U601  TPS562209DDCT  [DDC0006A]  69.79,35.09 180 top
U602  TPS562209DDCT  [DDC0006A]  66.42,47.96 180 top
U603  LP5900SD-3.3/NOPB  [6WDFN]  17.66,18.74 180 top
U701  MAX-M8Q  [UBLOX_MAX]  14.41,81.24 180 bottom
U801  MMBT3904-HF  [SOT103P240X110-3N]  83.19,40.16 0 top
U901  PCT2075D,118  [SOIC127P130X0600-8N]  56.64,84.84 0 bottom
U902  MS560702BA03-50  [SMD125P110X060-8N]  26.61,53.56 180 top
U903  MCP4541-103E/MS  [SOP65P490X110-8N]  79.44,18.19 270 bottom
U1001  MAX3232CSE+  [SO016]  80.72,80.95 90 bottom
U1002  MAX4311  [QSOP16]  22.99,50.63 270 bottom
U1101  2N7002P,215  [SOT95P230X110-3N]  5.15,15.13 90 bottom
U1102  2N7002P,215  [SOT95P230X110-3N]  5.28,42 90 bottom
U1103  2N7002P,215  [SOT95P230X110-3N]  6.01,27.86 90 bottom
U1104  2N7002P,215  [SOT95P230X110-3N]  5.9,55.07 90 bottom

## Library data of the parts
C401 C606 C610 = comms; MANUFACTURER: Murata; MANUFACTURER_PN: GRM188R61C105KA93D; TEMP_COEFF: X5R; TOLERANCE: 10%; VENDOR: Digi-Key; VENDOR_PN: 490-1536-1-ND; VOLTAGE: 16V
C402 C403 = comms; MANUFACTURER: Murata Electronics North America; MANUFACTURER_PN: GRM21BR61C106KE15L; TEMP_COEFF: X5R; TOLERANCE: 10%; VENDOR: Digi-Key; VENDOR_PN: 490-3886-1-ND; VOLTAGE: 16V
C404 C701 = comms; MANUFACTURER: Kemet; MANUFACTURER_PN: C0805C103K5RACTU; TEMP_COEFF: X7R; TOLERANCE: 10%; VENDOR: Digi-Key; VENDOR_PN: 399-1158-1-ND; VOLTAGE: 50V
C405 C502 C504 C603 C604 C1001-C1006 = comms; MANUFACTURER: AVX Corporation; MANUFACTURER_PN: 08053C104KAT2A; TEMP_COEFF: X7R; TOLERANCE: 10%; VENDOR: Digi-Key; VENDOR_PN: 478-3755-1-ND; VOLTAGE: 25V
C406 = comms; MANUFACTURER: Murata; MANUFACTURER_PN: GRM188R60J475KE19D; TEMP_COEFF: X5R; TOLERANCE: 10%; VENDOR: Digi-key; VENDOR_PN: 490-3297-1-ND; VOLTAGE: 6.3V
C407 C702 C901-C903 = comms; MANUFACTURER: Murata; MANUFACTURER_PN: GRM188R71C104KA01D; TEMP_COEFF: X7R; TOLERANCE: 10%; VENDOR: Digi-key; VENDOR_PN: 490-1532-1-ND; VOLTAGE: 16V
C408 C409 C602 C605 C607-C609 = comms; MANUFACTURER: Murata Electronics North America; MANUFACTURER_PN: GRM31CR61A226ME19L; TEMP_COEFF: X5R; TOLERANCE: 20%; VENDOR: Digi-Key; VENDOR_PN: 490-4738-1-ND; VOLTAGE: 10V
C501 = comms; ESR: 100 mOhm; MANUFACTURER: Panasonic; MANUFACTURER_PN: 20TQC8R2M; TOLERANCE: 20%; VENDOR: Digi-Key; VENDOR_PN: P16504CT-ND; VOLTAGE: 20V
C503 = comms; MANUFACTURER: Murata; MANUFACTURER_PN: GRM1885C1H242JA01D; TEMP_COEFF: C0G, NP0; TOLERANCE: 5%; VENDOR: Digi-Key; VENDOR_PN: 490-3282-1-ND; VOLTAGE: 50V
C505 = comms; MANUFACTURER: Samsung Electro-Mechanics America, Inc.; MANUFACTURER_PN: CL21C621JBCNNNC; TEMP_COEFF: C0G, NP0; TOLERANCE: 5%; VENDOR: Digi-Key; VENDOR_PN: 1276-2677-1-ND; VOLTAGE: 50V
C506 = comms; MANUFACTURER: Murata; MANUFACTURER_PN: GRM21BR61E475MA12L; TEMP_COEFF: X5R; TOLERANCE: 20%; VENDOR: Digi-Key; VENDOR_PN: 490-5422-1-ND; VOLTAGE: 25V
C507 = comms; ESR: 30mOhm; MANUFACTURER: KEMET; MANUFACTURER_PN: T521X476M035ATE030; TOLERANCE: 20%; VENDOR: Digi-Key; VENDOR_PN: 399-5937-1-ND; VOLTAGE: 35V
C601 = comms; MANUFACTURER: Murata; MANUFACTURER_PN: GRM32ER61E226KE15L; TEMP_COEFF: X5R; TOLERANCE: 10%; VENDOR: Digi-key; VENDOR_PN: 490-3889-1-ND; VOLTAGE: 25V
D501 = comms; CAP_REV_V: 200pF @4V, 1MHz; CURRENT_AVG_RECT: 3A; CURRENT_REV_LEAK: 500uA @40V; MANUFACTURER: Comchip; MANUFACTURER_PN: CDBA340-HF; VENDOR: Digi-key; VENDOR_PN: 641-1748-1-ND; VOLTAGE_DC_REV: 40V; VOLTAGE_FWD: 500mV @3A
FB701 FB702 = comms; DCR_MAX: 1.25 Ohm; IMPEDANCE: 1kOhm @100MHz; MANUFACTURER: Murata; MANUFACTURER_PN: BLM15HD102SN1D; MAX_CURRENT: 250mA; VENDOR: Digi-Key; VENDOR_PN: 490-4003-1-ND
H1201-H1204 IMAGE101 OUTLINE1201 TP1-TP13 TP16-TP45 TP47-TP57 = comms
J701 = comms; MANUFACTURER: Sparkfun; MANUFACTURER_PN: WRL-00593; VENDOR: Sparkfun; VENDOR_PN: WRL-00593
J801-J804 = comms; MANUFACTURER: Sparkfun; MANUFACTURER_PN: PRT-12639; VENDOR: SPARKFUN; VENDOR_PN: PRT-12639
J1201 = comms; FINISH: Gold; MANUFACTURER: Sullins Connector Solutions; MANUFACTURER_PN: SFH11-PBPC-D20-ST-BK; MAX_CURRENT: 3A; MOUNT_ANGLE: Vertical; MOUNT_TYPE: TH; PITCH: 2.54mm; POSITIONS: 40; ROWS: 2; VENDOR: Digi-Key; VENDOR_PN: S9200-ND
J1202 = comms; FINISH: Gold; MANUFACTURER: Sullins Connector Solutions; MANUFACTURER_PN: PPPC022LFBN-RC; MAX_CURRENT: 3A; MOUNT_ANGLE: Vertical; MOUNT_TYPE: TH; PITCH: 2.54mm; POSITIONS: 4; ROWS: 2; VENDOR: Digi-Key; VENDOR_PN: S7105-ND
J1203 J1308-J1310 = comms; FINISH: GOLD; LOCKING: YES; MANUFACTURER: Molex; MANUFACTURER_PN: 0705530001; MAX_CURRENT: 3.0A; MOUNT_ANGLE: RIGHT; MOUNT_TYPE: TH; POSITIONS: 2; VENDOR: Digi-key; VENDOR_PN: WM4900-ND
J1204 J1301 J1304-J1307 = comms; FINISH: GOLD; LOCKING: YES; MANUFACTURER: Molex; MANUFACTURER_PN: 0705530002; MAX_CURRENT: 3.0A; MOUNT_ANGLE: RIGHT; MOUNT_TYPE: TH; POSITIONS: 3; VENDOR: Digi-key; VENDOR_PN: WM4901-ND
J1205 = comms; FINISH: GOLD; LOCKING: YES; MANUFACTURER: Molex; MANUFACTURER_PN: 0705530004; MAX_CURRENT: 3.0A; MOUNT_ANGLE: RIGHT; MOUNT_TYPE: TH; POSITIONS: 5; VENDOR: Digi-key; VENDOR_PN: WM4903-ND
J1206 J1207 J1302 J1303 = comms; FINISH: GOLD; LOCKING: YES; MANUFACTURER: Molex; MANUFACTURER_PN: 0039301021; MAX_CURRENT: 13.0A; MOUNT_ANGLE: RIGHT; MOUNT_TYPE: TH; POSITIONS: 2; VENDOR: Digi-Key; VENDOR_PN: WM1363-ND
L401 L602 = comms; CURRENT_DC: 3A; CURRENT_SAT: 4A; DCR_MAX: 37.6mOHM; MANUFACTURER: Bourns Inc.; MANUFACTURER_PN: SRN6045-4R7Y; SHIELDED: Yes; TOLERANCE: 30%; TYPE: Wirewound; VENDOR: Digi-Key; VENDOR_PN: SRN6045-4R7YCT-ND
L501 = comms; CURRENT_DC: 4.5A; CURRENT_SAT: 3.7A; DCR_MAX: 18.5mOHM; MANUFACTURER: Bourns Inc; MANUFACTURER_PN: SRU1048-100Y; SHIELDED: Yes; TOLERANCE: 30%; TYPE: Wirewound; VENDOR: Digi-key; VENDOR_PN: SRU1048-100YCT-ND
L502 = comms; CURRENT_DC: 5.2A; CURRENT_SAT: 6.5A; DCR_MAX: 85 mOhm; MANUFACTURER: Eaton; MANUFACTURER_PN: HCMA1707-680-R; SHIELDED: Yes; TOLERANCE: 20%; TYPE: Wirewound; VENDOR: Digi-Key; VENDOR_PN: 283-4574-1-ND
L601 = comms; CURRENT_DC: 3.2A; CURRENT_SAT: 5A; DCR_MAX: 30.2mOHM; MANUFACTURER: Bourns Inc.; MANUFACTURER_PN: SRN6045-3R3Y; SHIELDED: Yes; TOLERANCE: 30%; TYPE: Wirewound; VENDOR: Digi-Key; VENDOR_PN: SRN6045-3R3YCT-ND
L701 = comms; CURRENT_DC: 300mA; CURRENT_SAT: -; DCR_MAX: 0.550mOHM; MANUFACTURER: Murata; MANUFACTURER_PN: LQG18HN27NJ00D; SHIELDED: Unshielded; TOLERANCE: 5%; TYPE: CHIP; VENDOR: Digikey; VENDOR_PN: 490-6579-1-ND
LED701 LED1201 = comms; FORWARD_CURRENT: 10mA; FORWARD_VOLTAGE: 1.8; MANUFACTURER: Lite-On; MANUFACTURER_PN: LTST-C170CKT; VENDOR: Digi-Key; VENDOR_PN: 160-1176-1-ND
OFFBOARD1 OFFBOARD7 OFFBOARD11 OFFBOARD30 OFFBOARD34 OFFBOARD38 = comms; MANUFACTURER: Molex; MANUFACTURER_PN: 50-57-9403; VENDOR: Digi-Key; VENDOR_PN: WM2901-ND
OFFBOARD2 OFFBOARD4 OFFBOARD8 OFFBOARD10 OFFBOARD12 OFFBOARD14 OFFBOARD16-OFFBOARD29 OFFBOARD31-OFFBOARD33 OFFBOARD35-OFFBOARD37 OFFBOARD39-OFFBOARD41 OFFBOARD43 OFFBOARD44 = comms; MANUFACTURER: Molex; MANUFACTURER_PN: 0016020087; VENDOR: Digi-Key; VENDOR_PN: WM2512CT-ND
OFFBOARD3 = comms; MANUFACTURER: Molex; MANUFACTURER_PN: 0050579405; VENDOR: Digi-Key; VENDOR_PN: WM2903-ND
OFFBOARD5 = comms; MANUFACTURER: Amphenol FCI; MANUFACTURER_PN: 67996-104HLF; VENDOR: Digi-Key; VENDOR_PN: 609-3201-ND
OFFBOARD6 = comms; MANUFACTURER: Sullins; MANUFACTURER_PN: PRPC020DAAN-RC; VENDOR: Digi-Key; VENDOR_PN: S2011EC-20-ND
OFFBOARD9 OFFBOARD13 OFFBOARD15 OFFBOARD42 OFFBOARD48 = comms; MANUFACTURER: Molex; MANUFACTURER_PN: 50-57-9402; VENDOR: Digi-Key; VENDOR_PN: WM2900-ND
OFFBOARD45 = comms; MANUFACTURER: Molex; MANUFACTURER_PN: 0701070001; VENDOR: Digi-Key; VENDOR_PN: WM2533-ND
OFFBOARD46 OFFBOARD47 = comms; MANUFACTURER: Molex; MANUFACTURER_PN: 0016020115; VENDOR: Digi-Key; VENDOR_PN: WM2515-ND
OFFBOARD49 OFFBOARD52 OFFBOARD55 OFFBOARD56 OFFBOARD64 OFFBOARD65 = comms; MANUFACTURER: Molex; MANUFACTURER_PN: 0039013022; VENDOR: Digi-Key; VENDOR_PN: WM1021-ND
OFFBOARD50 OFFBOARD51 OFFBOARD53 OFFBOARD54 OFFBOARD57-OFFBOARD60 OFFBOARD66-OFFBOARD69 = comms; MANUFACTURER: Molex; MANUFACTURER_PN: 0039000073; VENDOR: Digi-Key; VENDOR_PN: WM6890CT-ND
OFFBOARD61 OFFBOARD70 = comms; MANUFACTURER: Molex; MANUFACTURER_PN: 0039013023; VENDOR: Digi-Key; VENDOR_PN: WM1030-ND
OFFBOARD62 OFFBOARD63 OFFBOARD71 OFFBOARD72 = comms; MANUFACTURER: Molex; MANUFACTURER_PN: 0039000075; VENDOR: Digi-Key; VENDOR_PN: WM6891CT-ND
Q501 = comms; MANUFACTURER: Texas Instruments; MANUFACTURER_PN: CSD17579Q3A; VENDOR: Digi-Key; VENDOR_PN: 296-39998-1-ND
Q1101-Q1104 = comms; MANUFACTURER: ON Semiconductor; MANUFACTURER_PN: NTR4101PT1G; VENDOR: Digi-Key; VENDOR_PN: NTR4101PT1GOSCT-ND
R401 R909 R910 R912 R915 R1005 R1006 = comms; MANUFACTURER: Panasonic; MANUFACTURER_PN: ERJ-3GEY0R00V; POWER: 1/10W; TOLERANCE: JUMPER; VENDOR: Digi-key; VENDOR_PN: P0.0GCT-ND
R402 R603 = comms; MANUFACTURER: Panasonic; MANUFACTURER_PN: ERJ-3EKF5622V; POWER: 1/10W; TOLERANCE: 1%; VENDOR: Digi-key; VENDOR_PN: P56.2KHCT-ND
R403-R405 R501 R503 R509 R602 R604 R1101-R1104 R1107-R1110 = comms; MANUFACTURER: Panasonic; MANUFACTURER_PN: ERJ-3EKF1002V; POWER: 1/10W; TOLERANCE: 1%; VENDOR: Digi-key; VENDOR_PN: P10.0KHCT-ND
R502 = comms; MANUFACTURER: Panasonic; MANUFACTURER_PN: ERJ-3EKF1151V; POWER: 1/10W; TOLERANCE: 1%; VENDOR: Digi-Key; VENDOR_PN: P1.15KHCT-ND
R504 = comms; MANUFACTURER: Panasonic; MANUFACTURER_PN: ERJ-3EKF1000V; POWER: 1/10W; TOLERANCE: 1%; VENDOR: Digi-Key; VENDOR_PN: P100HCT-ND
R505 R801-R805 R807 R901-R908 R911 R914 R1105 R1106 R1111 R1112 = comms; MANUFACTURER: Panasonic; MANUFACTURER_PN: ERJ-6GEY0R00V; POWER: 1/8W; TOLERANCE: JUMPER; VENDOR: Digi-Key; VENDOR_PN: P0.0ACT-ND
R506 = comms; MANUFACTURER: Panasonic; MANUFACTURER_PN: ERJ-3EKF3012V; POWER: 1/10W; TOLERANCE: 1%; VENDOR: Digi-Key; VENDOR_PN: P30.1KHCT-ND
R507 = comms; MANUFACTURER: Panasonic; MANUFACTURER_PN: ERJ-8CWFR016V; POWER: 1W; TOLERANCE: 1%; VENDOR: Digi-Key; VENDOR_PN: P0.016BVCT-ND
R508 = comms; MANUFACTURER: Panasonic; MANUFACTURER_PN: ERJ-3EKF8452V; POWER: 1/10W; TOLERANCE: 1%; VENDOR: Digi-Key; VENDOR_PN: P84.5KHCT-ND
R601 = comms; MANUFACTURER: Panasonic; MANUFACTURER_PN: ERJ-3EKF3322V; POWER: 1/10W; TOLERANCE: 1%; VENDOR: Digi-Key; VENDOR_PN: P33.2KHCT-ND
R701 = comms; MANUFACTURER: Panasonic; MANUFACTURER_PN: ERJ-3EKF10R0V; POWER: 1/10W; TOLERANCE: 1%; VENDOR: Digi-key; VENDOR_PN: P10.0HCT-ND
R702 = comms; MANUFACTURER: Panasonic; MANUFACTURER_PN: ERJ-6ENF3900V; POWER: 1/8W; TOLERANCE: 1%; VENDOR: Digi-Key; VENDOR_PN: P390CCT-ND
R806 R808 = comms; MANUFACTURER: Panasonic; MANUFACTURER_PN: ERJ-3EKF1001V; POWER: 1/10W; TOLERANCE: 1%; VENDOR: Digi-key; VENDOR_PN: P1.00KHCT-ND
R913 R916-R918 = comms; MANUFACTURER: Panasonic; MANUFACTURER_PN: ERJ-3EKF4701V; POWER: 1/10W; TOLERANCE: 1%; VENDOR: Digi-Key; VENDOR_PN: P4.70KHCT-ND
R1001-R1004 R1007 = comms; MANUFACTURER: Panasonic; MANUFACTURER_PN: ERJ-3EKF75R0V; POWER: 1/10W; TOLERANCE: 1%; VENDOR: Digi-key; VENDOR_PN: P75.0HCT-ND
R1201 = comms; MANUFACTURER: Panasonic; MANUFACTURER_PN: ERJ-6ENF1500V; POWER: 1/8W; TOLERANCE: 1%; VENDOR: Digi-Key; VENDOR_PN: P150CCT-ND
R1202-R1205 = comms; MANUFACTURER: Panasonic; MANUFACTURER_PN: ERJ-3EKF23R2V; POWER: 1/10W; TOLERANCE: 1%; VENDOR: Digi-Key; VENDOR_PN: P23.2HCT-ND
U401 = comms; MANUFACTURER: Texas Instruments; MANUFACTURER_PN: LP2985-33DBVR; VENDOR: Digi-Key; VENDOR_PN: 296-18476-1-ND
U402 U601 U602 = comms; MANUFACTURER: Texas Instruments; MANUFACTURER_PN: TPS562209DDCT; VENDOR: Digi-Key; VENDOR_PN: 296-37302-1-ND
U403 = comms; MANUFACTURER: Maxim; MANUFACTURER_PN: MAX6371KA+T; OUTPUT_ACTIVE: Low; OUTPUT_ACTIVE_TIME: 120us (min); OUTPUT_TYPE: Open Drain; STARTUP_DELAY: 60s; TIMEOUT: Adjustable (up to 60s); VENDOR: Digikey; VENDOR_PN: MAX6371KA+TCT-ND
U501 U1101-U1104 = comms; MANUFACTURER: NXP; MANUFACTURER_PN: 2N7002P,215; PACKAGE: SOT-23-3; VENDOR: Digi-Key; VENDOR_PN: 568-5818-1-ND
U502 = comms; MANUFACTURER: Texas Instruments; MANUFACTURER_PN: LM3488MMX/NOPB; VENDOR: Digi-Key; VENDOR_PN: 296-35417-1-ND
U503 = comms; MANUFACTURER: Fairchild; MANUFACTURER_PN: NDT2955; PACKAGE: SOT-223-4; VENDOR: Digi-Key; VENDOR_PN: NDT2955CT-ND
U603 = comms; MANUFACTURER: TI; MANUFACTURER_PN: LP5900SD-3.3/NOPB; VENDOR: Digi-Key; VENDOR_PN: LP5900SD-3.3/NOPBCT-ND
U701 = comms; MANUFACTURER: u-blox; MANUFACTURER_PN: MAX-M8Q; VENDOR: Digi-Key; VENDOR_PN: 672-1003-1-ND
U801 = comms; MANUFACTURER: Comchip; MANUFACTURER_PN: MMBT3904-HF; VENDOR: Digikey; VENDOR_PN: 641-1683-1-ND
U901 = comms; INTERFACE: I2C; MANUFACTURER: NXP; MANUFACTURER_PN: PCT2075D,118; RESOLUTION: 10b; VENDOR: Digi-key; VENDOR_PN: 568-10219-1-ND
U902 = comms; INTERFACE: I2C,SPI; MANUFACTURER: TE Connectivity; MANUFACTURER_PN: MS560702BA03-50; OUTPUT_BITS: 24b; PRESSURE_TYPE: Absolute; VENDOR: Digi-key; VENDOR_PN: 223-1198-1-ND
U903 = comms; MANUFACTURER: Microchip; MANUFACTURER_PN: MCP4541-103E/MS; MPN: MCP4541-103E/MS; OC_FARNELL: 1698945; OC_NEWARK: 77M2864; PACKAGE: SOP-8; VENDOR: Digi-Key; VENDOR_PN: MCP4541T-103E/MFCT-ND
U1001 = comms; MANUFACTURER: Maxim; MANUFACTURER_PN: MAX3232CSE+; VENDOR: Digikey; VENDOR_PN: MAX3232CSE+-ND
U1002 = comms; MANUFACTURER: Maxim; MANUFACTURER_PN: MAX4311EEE+; VENDOR: Digikey; VENDOR_PN: MAX4311EEE+-ND

## Nets
3P3V_DIG_POT: C605.1 C608.1 C903.1 L601.2 R501.2 R601.2 R917.2 R918.2 R1101.2 R1102.2 R1107.2 R1108.2 TP11.TP U903.8
3P3V_RS232: C610.1 C1002.1 TP13.TP U603.1 U1001.16
3P3V_SENSORS: C406.1 C407.1 C702.1 C901.2 C902.2 R401.1 R405.2 R901.2 R903.2 R913.2 R916.2 TP3.TP U401.5 U403.4 U403.5 U403.8 U701.6_V_BCKP U701.7_VCC_IO U701.8_VCC U701.9_V_RESET U901.8 U902.1 U902.2
5V_BOARD: C602.1 C606.1 C607.1 C609.1 C1001.1 L602.2 Q1101.2 Q1102.2 Q1103.2 Q1104.2 R603.2 R1103.2 R1104.2 R1105.2 R1106.2 R1109.2 R1110.2 R1111.2 R1112.2 TP12.TP U601.3 U601.5 U603.4 U603.6 U1002.4 U1002.14
5V_BUCK_SW: C604.2 L602.1 U602.2
5V_BUCK_VBST: C604.1 U602.6
5V_BUCK_VFB: R603.1 R604.2 U602.4
5V_CAM0: J1304.2 Q1101.3 R1105.1
5V_CAM1: J1305.2 Q1103.3 R1111.1
5V_CAM2: J1306.2 Q1102.3 R1106.1
5V_CAM3: J1307.2 Q1104.3 R1112.1
5V_PI: C408.1 C409.1 J1201.2 J1201.4 L401.2 R402.2 TP5.TP
7P4V_IN: C401.1 C402.1 C403.1 J1206.1 J1207.1 TP1.TP U401.1 U401.3 U402.3 U402.5
11P1V_IN: C501.1 C502.1 C601.1 J1302.1 L501.1 TP7.TP U502.8 U602.3 U602.5
12V_BOARD: C507.1 D501.C J1303.1 R503.2 R505.2 R508.2 TP10.TP U503.3
12V_PI_CONTROLLED: J1308.1 R505.1 TP9.TP U503.2 U503.4
12V_PMOS_G: R503.1 TP8.TP U501.3 U503.1
BUCK_POT_SW: C603.2 L601.1 U601.2
BUCK_POT_VBST: C603.1 U601.6
BUCK_POT_VFB: R601.1 R602.2 U601.4
CAM0_P_G: Q1101.1 R1103.1 TP37.TP U1101.3
CAM1_P_G: Q1103.1 R1109.1 TP39.TP U1103.3
CAM2_P_G: Q1102.1 R1104.1 TP38.TP U1102.3
CAM3_P_G: Q1104.1 R1110.1 TP40.TP U1104.3
DCDC_STEPUP_COMP: C503.1 R502.2 U502.2
DCDC_STEPUP_DR: Q501.4 U502.6
DCDC_STEPUP_FB: R508.1 R509.2 U502.3
DCDC_STEPUP_ISENSE: C505.1 R504.1 U502.1
DCDC_STEPUP_ISENSE_RES: Q501.1 Q501.2 Q501.3 R504.2 R507.2
DCDC_STEPUP_OUT: C506.1 L501.2 Q501.5 Q501.6 Q501.7 Q501.8 Q501.9 Q501.V
DCDC_STEPUP_PRE_DIODE: C506.2 D501.A L502.1
DCDC_STEPUP_RC_COMP: C504.1 R502.1
DCDC_STEPUP_SD: R506.2 U502.7
GND: C401.2 C402.2 C403.2 C404.2 C406.2 C407.2 C408.2 C409.2 C501.2 C502.2 C503.2 C504.2 C505.2 C507.2 C601.2 C602.2 C605.2 C606.2 C607.2 C608.2 C609.2 C610.2 C701.2 C702.2 C901.1 C902.1 C903.2 C1001.2 C1002.2 C1005.2 C1006.2 J701.GND@0 J701.GND@1 J701.GND@2 J701.GND@3 J801.EARTH J801.RING2 J804.EARTH J804.RING2 J1201.6 J1201.9 J1201.14 J1201.20 J1201.25 J1201.30 J1201.34 J1201.39 J1202.2 J1203.1 J1203.2 J1204.3 J1205.5 J1206.2 J1207.2 J1302.2 J1303.2 J1304.3 J1305.3 J1306.3 J1307.3 J1308.2 J1309.2 J1310.2 L502.2 LED701.C LED1201.C R403.1 R404.1 R506.1 R507.1 R509.1 R602.1 R604.1 R802.1 R807.2 R808.2 R902.1 R904.1 R905.1 R906.1 R915.1 R1001.1 R1002.1 R1003.1 R1004.1 R1006.1 TP2.TP TP45.TP U401.2 U402.1 U403.2 U501.2 U502.4 U502.5 U601.1 U602.1 U603.3 U603.7 U701.1_GND U701.10_GND U701.12_GND U901.4 U902.3 U903.4 U1001.8 U1001.10 U1001.13 U1001.15 U1002.13 U1101.2 U1102.2 U1103.2 U1104.2
GPIO_MUX_ADDR0: J1201.38 TP34.TP U1002.2
GPIO_MUX_ADDR1: J1201.40 TP35.TP U1002.1
GPIO_POT_HVC: J1201.26 R912.1
GPIO_PTT: J1201.36 R806.1 R808.1 TP21.TP
GPS_ANTENNA: J701.SIG L701.1 U701.11_RF_IN
GPS_EXTINT: TP16.TP U701.5_EXTINT0
GPS_LED_DRIVE: LED701.A R702.2
GPS_RXD: TP17.TP U701.3_RXD1
GPS_SCL: FB701.2 U701.17_SCL2
GPS_SDA: FB702.2 U701.16_SDA2
GPS_TIMEPULSE: R702.1 U701.4_TIMEPULSE
GPS_TXD: TP18.TP U701.2_TXD1
GPS_VCC-RF: R701.2 U701.14_VCC_RF
GPS_VCC_RF_RLC: C701.1 L701.2 R701.1
MISO: J1201.21 J1205.3 TP42.TP
MOSI: J1201.19 J1205.4 TP44.TP
MUX_FB: R1005.1 R1006.2 U1002.15
MUX_OUT: R1005.2 R1007.2 U1002.16
OSD_DATA: J1309.1 TP36.TP U1001.14
PI_3P3V: J1201.1 TP47.TP
PI_3P3V_2: J1201.17 TP51.TP
PI_12V_CTL: J1201.32 R501.1 TP57.TP U501.1
PI_BUCK_SW: C405.2 L401.1 U402.2
PI_BUCK_VBST: C405.1 U402.6
PI_BUCK_VFB: R402.1 R403.2 U402.4
PI_CAM0_VCTL: J1201.11 R1101.1 U1101.1
PI_CAM1_VCTL: J1201.13 R1107.1 U1103.1
PI_CAM2_VCTL: J1201.15 R1102.1 U1102.1
PI_CAM3_VCTL: J1201.16 R1108.1 U1104.1
PI_GPCLK0: J1201.7 TP50.TP
PI_GPIO25: J1201.22 TP56.TP
PI_LED_DRIVE: LED1201.A R1201.2
PI_MISO1: J1201.35 TP53.TP
PI_PWM0: J1201.12 TP55.TP
PI_PWM1: J1201.33 TP52.TP
PI_SCL: J1201.28 R1205.1
PI_SCL_5: J1201.5 R1203.2
PI_SDA: J1201.27 R1204.2
PI_SDA_3: J1201.3 R1202.2
PI_STATUS_LED: J1201.18 R1201.1
PI_UART_RXD: J1201.10 TP54.TP
POT_A: J1301.1 TP30.TP U903.5
POT_B: J1301.2 TP32.TP U903.7
POT_HVCA0: R912.2 R915.2 TP27.TP U903.1
POT_SCL: R909.1 R918.1 R1203.1 TP49.TP
POT_SCL_IN: R909.2 U903.2
POT_SDA: R910.1 R917.1 R1202.1 TP48.TP
POT_SDA_IN: R910.2 U903.3
POT_W: J1301.3 TP31.TP U903.6
PRES_CSB: R903.1 R904.2 TP24.TP U902.4 U902.5
PRES_SCL: R914.1 U902.8
PRES_SDA: R908.1 U902.7
PRES_SDO: TP25.TP U902.6
PTT: R805.1 TP22.TP U801.3
PTT_BJT_B: R806.2 U801.1
PTT_BJT_E: R807.1 U801.2
RS232_C1+: C1003.1 U1001.1
RS232_C1-: C1003.2 U1001.3
RS232_C2+: C1004.1 U1001.4
RS232_C2-: C1004.2 U1001.5
RS232_V+: C1006.1 U1001.2
RS232_V-: C1005.1 U1001.6
RX_IN_R: J804.RING1 R804.1
RX_IN_T: J804.TIP R801.1
RX_OUT_R: J803.RING1 R804.2
RX_OUT_S: J803.EARTH J803.RING2 R802.2
RX_OUT_T: J803.TIP R801.2
SCL: FB701.1 J1204.2 R911.2 R914.2 R916.1 R1205.2 TP29.TP
SCLK: J1201.23 J1205.2 TP43.TP
SDA: FB702.1 J1204.1 R907.2 R908.2 R913.1 R1204.1 TP28.TP
SENSOR_LDO_BYPASS: C404.1 U401.4
SS: J1201.24 J1205.1 TP41.TP
TEMP_A0: R901.1 R902.2 TP23.TP U901.7
TEMP_A1: R905.2 U901.6
TEMP_A2: R906.2 U901.5
TEMP_OS: TP26.TP U901.3
TEMP_SCL: R911.1 U901.2
TEMP_SDA: R907.1 U901.1
TX_IN_R: J801.RING1 R803.2
TX_IN_T: J801.TIP TP19.TP
TX_OUT_R: J802.RING1 R803.1
TX_OUT_S: J802.EARTH J802.RING2 R805.2
TX_OUT_T: J802.TIP TP20.TP
UART_TXD: J1201.8 TP33.TP U1001.11
VID_IN0: J1304.1 R1001.2 U1002.5
VID_IN1: J1305.1 R1002.2 U1002.7
VID_IN2: J1306.1 R1003.2 U1002.10
VID_IN3: J1307.1 R1004.2 U1002.12
VID_OUT: J1310.1 R1007.1
WDT_BITE_N: J1202.4 R405.1 TP6.TP U403.7
WDT_PET: J1201.31 R404.2 TP4.TP U403.1
WDT_SET2: R401.2 U403.6